# Altium PCB Sub1G_V2.2_ZM_revA_20160823.PcbDoc
Units mm, origin at the board's own origin, x right, y up, seen from the top; angles counter-clockwise.
Board outline 48 x 21 mm, 4 copper layers (Top Layer, Internal Plane 1, Mid-Layer 1, Bottom Layer); 64 components, 50 nets, 228 pads, 155 vias.
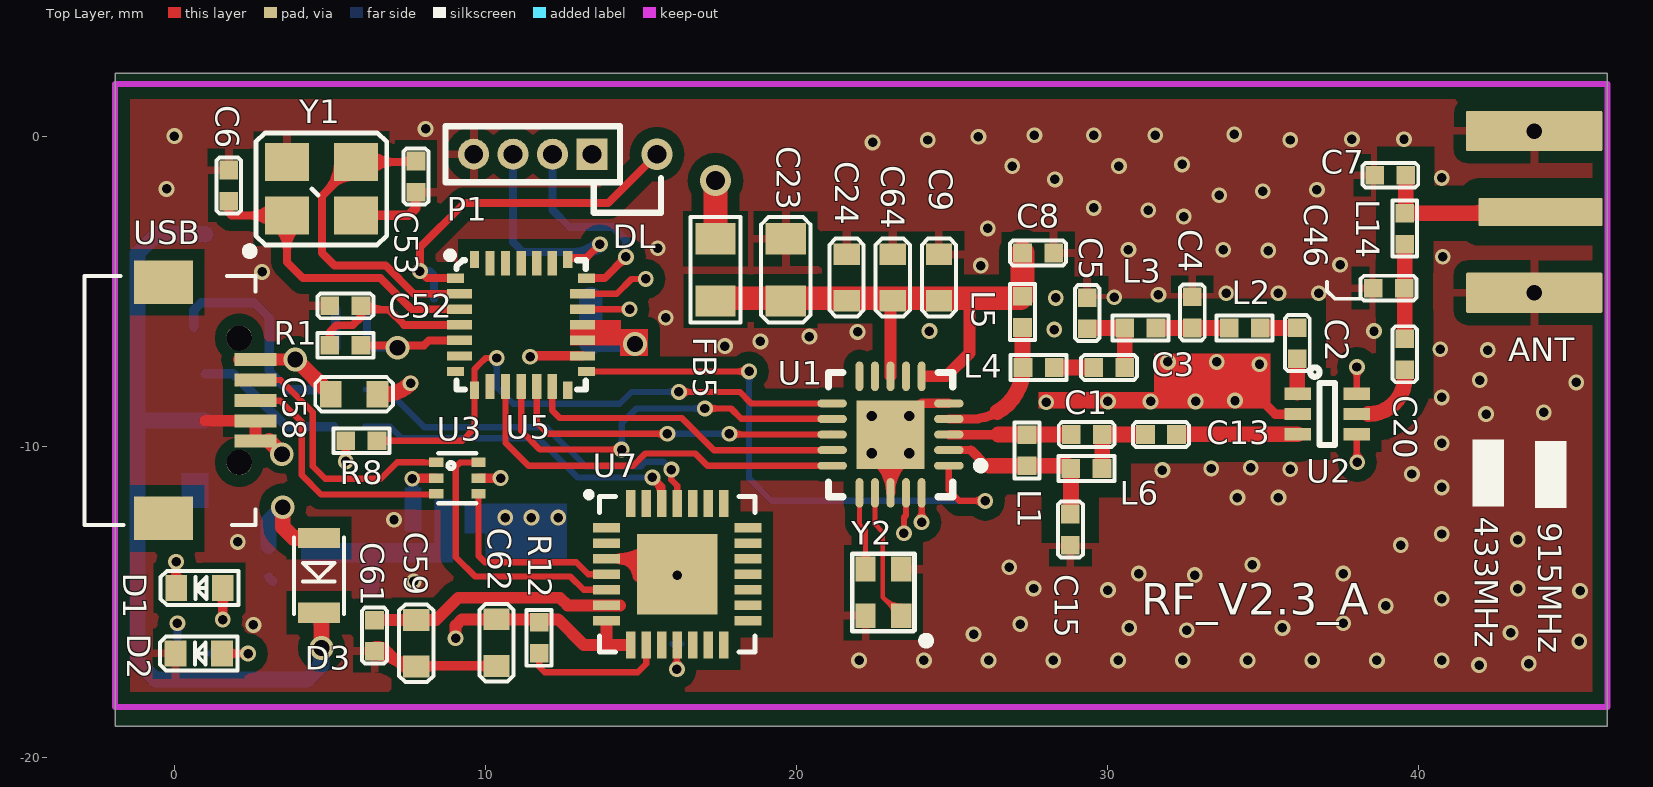
[diagram p0: Top Layer view]
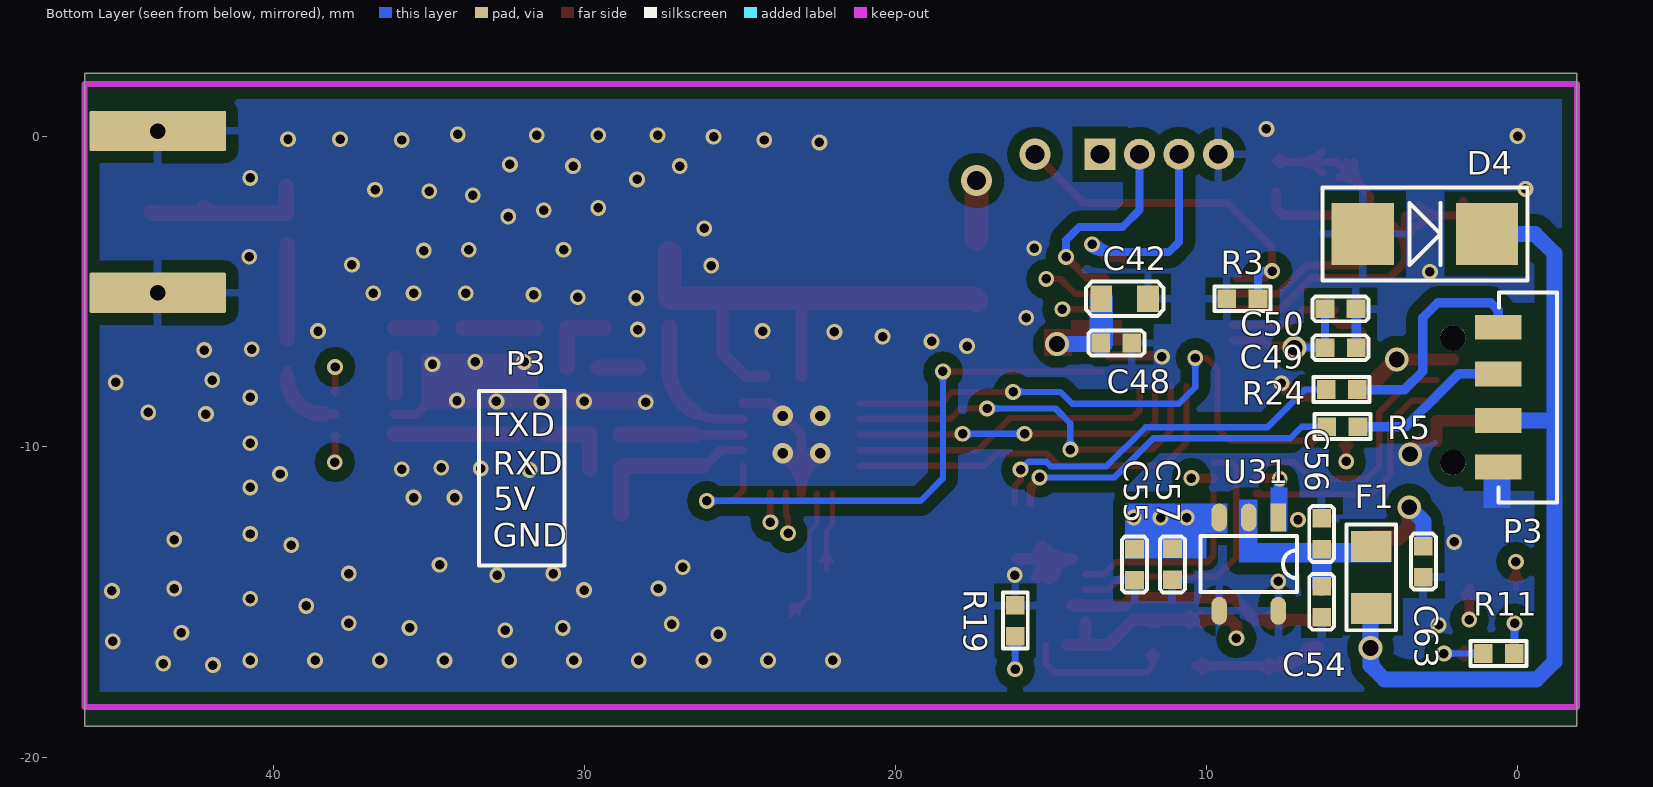
[diagram p1: Bottom Layer view, seen from below]
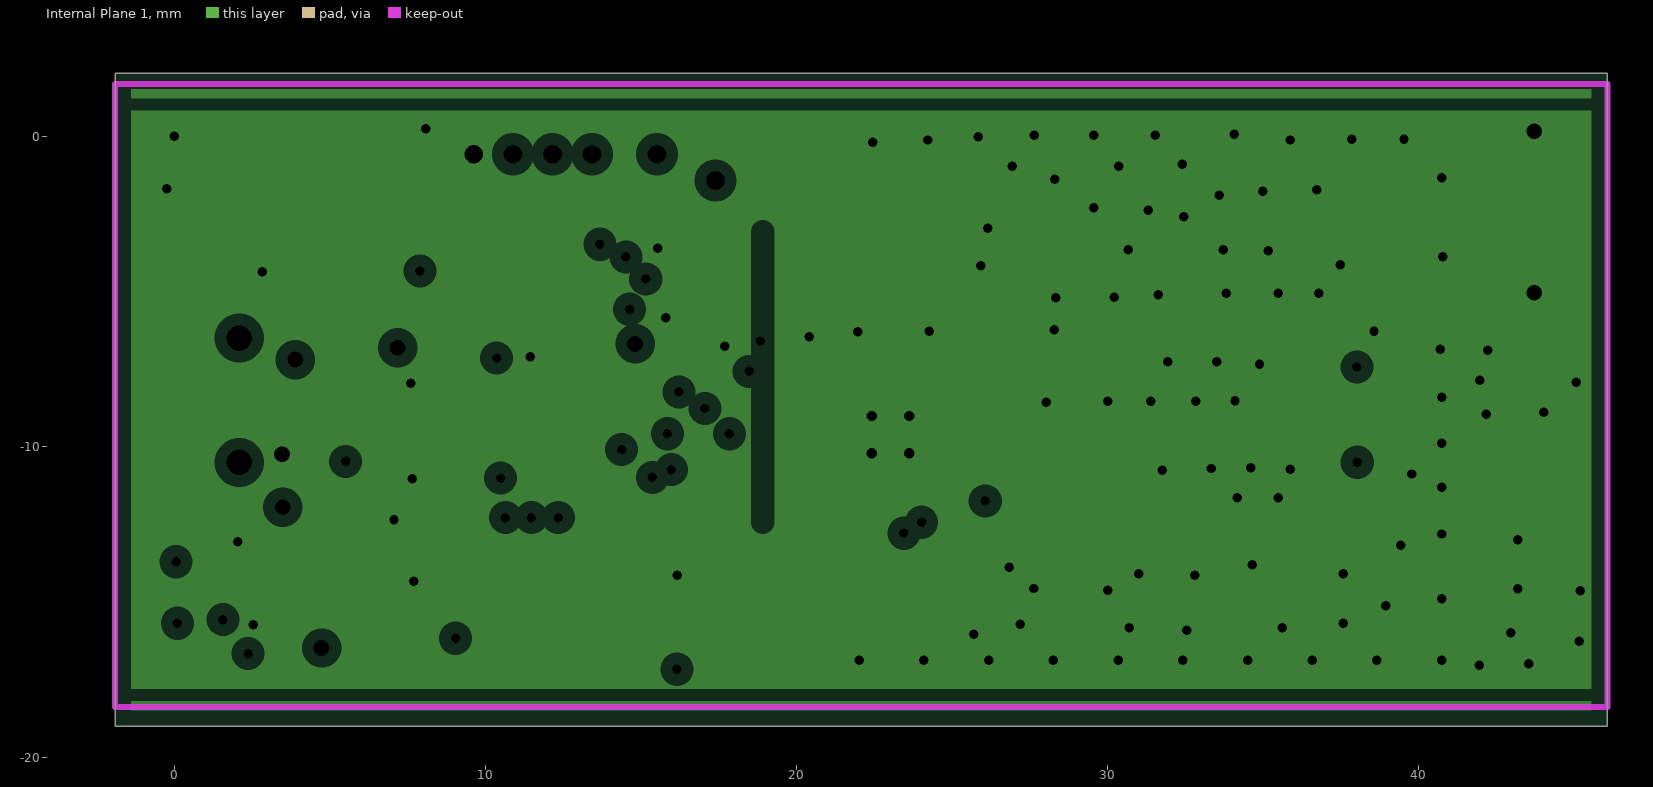
[diagram p2: Internal Plane 1, clearances drawn from the general rule]
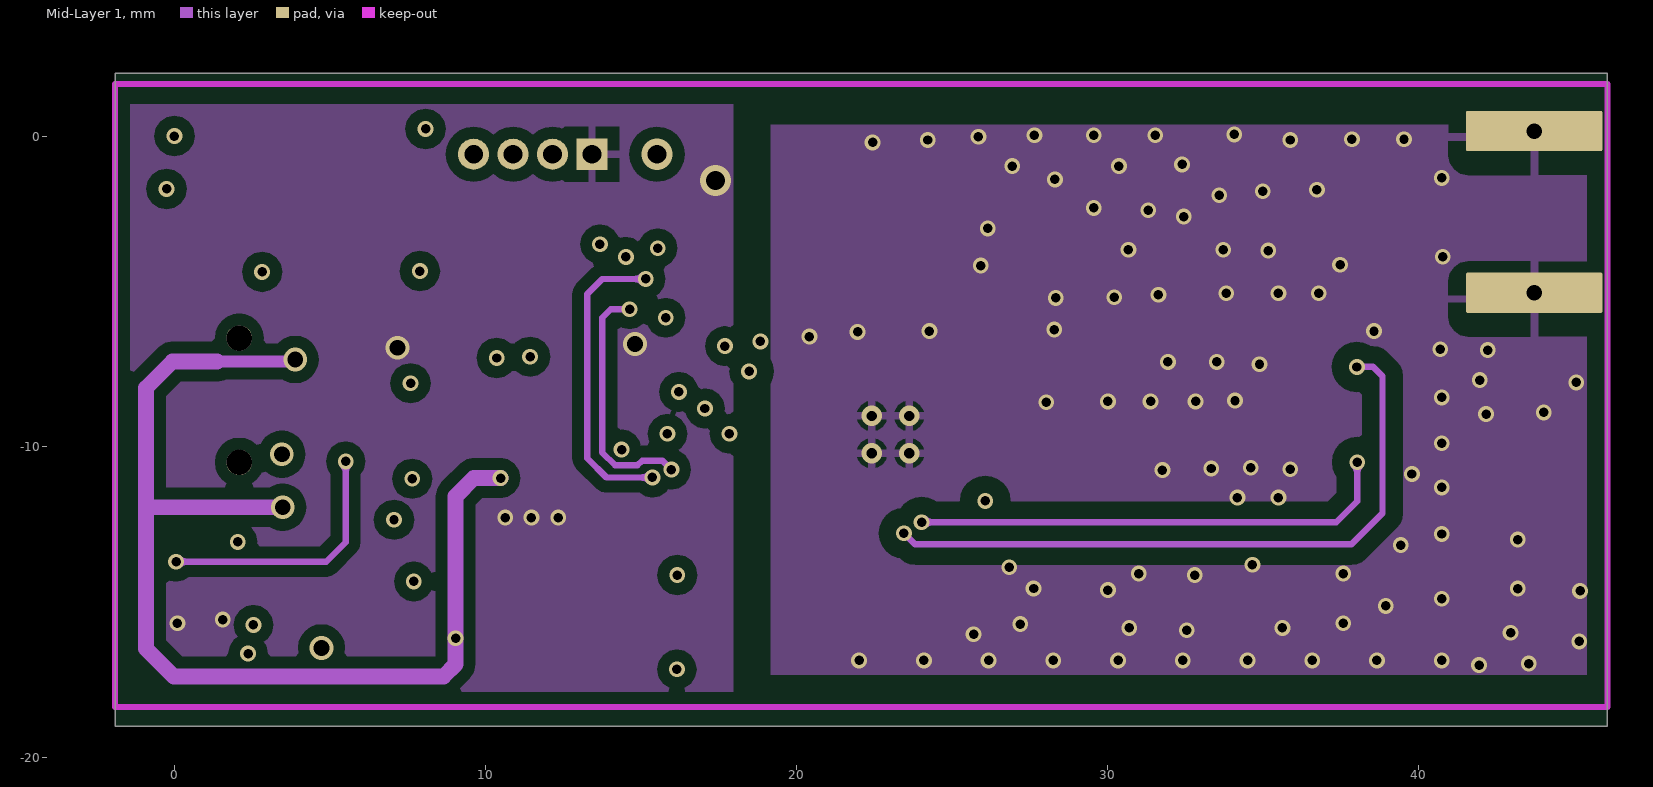
[diagram p3: Mid-Layer 1]

## Layer stack, top to bottom
Top Layer: signal copper 0.0356
Dielectric: core 0.32, FR-4, Dk 4.8
Internal Plane 1: plane copper 0.0356, net GND
Dielectric: prepreg 0.32, FR-4, Dk 4.8
Mid-Layer 1: signal copper 0.0356
Dielectric: core 0.32, FR-4, Dk 4.8
Bottom Layer: signal copper 0.0356

## Board outline
-1.911,-18.984 46.089,-18.984 46.089,2.016 -1.911,2.016

## Design rules (kind name [scope] priority, off if disabled: settings)
Clearance Polygon_RF [InNetClass('RF')] p1: gap=0.635
Clearance GND [InPoly And InNet(GND)] p2: gap=0.381
Clearance POWER [InNet('3V3')] p3: gap=0.381
Clearance [All] p4: gap=0.152
DiffPairsRouting [All] p1: maxlimit=0.254 minlimit=0.254 mostfreqgap=0.254 maxuncoupledlength=12.7
MinimumSolderMaskSliver [All] p1: minsoldermaskwidth=0.051
PlaneClearance [All] p1: clearance=0.381
PlaneConnect [All] p1: planeconnectstyle=Relief reliefexpansion=0.508 reliefentries=4 reliefconductorwidth=0.254 reliefairgap=0.254
PolygonConnect [IsVia] p1: connectstyle=Direct reliefconductorwidth=0.254 reliefentries=4 polygonreliefangle="90 Angle"
RoutingVias [All] p1: holewidth=0.711 width=1.27 viastyle="Through Hole" minholewidth=0.711 minwidth=1.27 maxholewidth=0.711 maxwidth=1.27
SilkToSilkClearance [All] p1: silktosilkclearance=0.076
SilkscreenOverComponentPads [All] p1: minsilkscreentomaskgap=0
SolderMaskExpansion [All] p1: expansion=0.102
Width [All] p1: maxlimit=5.08 minlimit=0.152 preferedwidth=0.254
22 further rules are at their usual default settings.

## Classes and differential pairs
component class USB: C59 C61 C62 C63 R12 R19 U7
component class RF: ANT C1 C2 C3 C4 C5 C7 C8 C9 C13 C15 C20 C23 C24 C46 C64 FB5 L1 L2 L3 L4 L5 L6 L14 TXRA U1 U2 Y2
component class POWER: C54 C55 C56 C57 D2 D3 D4 F1 R11 U31
component class MCU: C6 C42 C48 C49 C50 C52 C53 D1 P1 R1 R3 R8 U5 Y1
component class Interface: C58 P3 R5 R24 U3 USB
net class RF: NetANT_1 NetC1_1 NetC1_2 NetC2_1 NetC2_2 NetC3_1 NetC3_2 NetC4_1 NetC13_2 NetC15_2 NetC20_1 NetC20_2 NetL4_2
differential pair D: +D_P -D_N

## Components (designator, comment, footprint, x,y, rotation, side; value= is the part's Value field where it differs from the comment)
ANT "SMA/142-0711-821" "SMA END LAUNCH JACK RECEPTACLE SHORT" 43.936,-2.438 r90 top
C1 "1pF/50V" 0402C 28.843,-9.601 r0 top
C2 "56pF/50V" 0402C 36.117,-7.163 r90 top
C3 "3.3pF/50V" 0402C 29.564,-7.442 r0 top
C4 "2.7pF/50V" 0402C 32.739,-6.172 r90 top
C5 "4.7pF/50V" 0402C 29.36,-6.198 r90 top
C6 "8pF/50V" 0402C 1.747,-1.092 r270 top
C7 "4.3pF/50V" 0402C 38.606,-1.261 r0 top
C8 "56pF/50V" 0402C 27.278,-3.759 r0 top
C9 "33pF/50V" 0603C 24.59,-3.799 r270 top
C13 "56pF/50V" 0402C 31.231,-9.601 r0 top
C15 "3pF/50V" 0402C 28.818,-13.157 r90 top
C20 "56pF/50V" 0402C 39.571,-6.518 r270 top
C23 "22uF/10V" 0805C 19.662,-3.302 r270 top
C24 "100nF/10V" 0603C 21.618,-3.799 r270 top
C42 "10uF/25V" 0603C 13.386,-5.234 r180 bottom
C46 "4.3pF/50V" 0402C 38.555,-4.893 r0 top
C48 "0.01uF/50V" 0402C 13.405,-6.656 r180 bottom
C49 "0.01uF/50V" 0402C 6.192,-6.807 r180 bottom
C50 "0.01uF/50V" 0402C 6.194,-5.556 r180 bottom
C52 "0.01uF/50V" 0402C 5.998,-5.461 r180 top
C53 "8pF/50V" 0402C 7.766,-1.803 r90 top
C54 "0.1uF/50V" 0402C 6.299,-14.479 r270 bottom
C55 "0.1uF/50V" 0402C 12.319,-13.286 r270 bottom
C56 "10uF/25V" 0402C 6.299,-12.295 r270 bottom
C57 "10uF/25V" 0402C 11.1,-14.276 r90 bottom
C58 "10uF/25V" 0603C 6.528,-8.307 r180 top
C59 "4.7uF/25V" 0603C 7.778,-17.064 r90 top
C61 "0.1uF/50V" 0402C 6.433,-15.57 r270 top
C62 "10uF/25V" 0603C 10.357,-15.545 r270 top
C63 "0.1uF/50V" 0402C 3.029,-13.19 r270 bottom
C64 "100pF/50V" 0603C 23.104,-3.799 r270 top
D1 "LED0" 0603LED 1.555,-14.536 r180 top
D2 "LED0" 0603LED 1.53,-16.644 r180 top
D3 "NSR0320MW2T1G" SOD323 4.648,-12.93 r270 top
D4 "SMAJ18A" SMA 4.978,-3.15 r180 bottom
F1 "SMD0805-020" 0805R 4.705,-15.197 r90 bottom
FB5 "GZ2012D800TF" 0805CZ 17.402,-5.302 r90 top
L1 "18nH/0402HP-18NXJL" 0402R 27.421,-9.608 r270 top
L2 "10nH/0402HP-10NXJL" 0402R 34.923,-6.172 r180 top
L3 "10nH/0402HP-10NXJL" 0402R 31.57,-6.172 r180 top
L4 "13nH/0402HP-13NXJL" 0402R 28.294,-7.442 r180 top
L5 "120nH/0402HPH-R12XJL" 0402R 27.278,-5.156 r270 top
L6 "22nH/0402HP-22NXJL" 0402R 29.834,-10.693 r180 top
L14 "8.2nH/0402HP-8N2XJL" 0402R 39.571,-2.48 r270 top
P1 "MHDR1X4" MHDR1X4 13.431,-0.584 r180 top
P3 "Header 4" 4×1.5MMSMT_NOPAD 0.616,-10.65 r90 bottom
R1 "10K/5%/1/8W" 0402R 4.998,-6.731 r0 top
R3 "10K/5%/1/8W" 0402R 9.347,-5.232 r180 bottom
R5 "22/5%/1/8W" 0402R 5.131,-9.347 r0 bottom
R8 "1K/5%/1/8W" 0402R 5.512,-9.8 r0 top
R11 "1K/5%/1/8W" 0402R 0.108,-16.644 r0 bottom
R12 "1K/5%/1/8W" 0402R 11.728,-15.638 r270 top
R19 "10K/5%/1/8W" 0402R 16.154,-15.088 r270 bottom
R24 "22/5%/1/8W" 0402R 5.156,-8.153 r0 bottom
U1 "Si4463-C2A-GM" QFN50P400X400X80-20N 23.032,-9.601 r180 top
U2 "UPG2214TB" SC70-6 37.082,-8.941 r0 top
U3 "NUF2042XV6T1" SOT563-6 9.093,-11 r270 top
U5 "STM32F042G6U6" UFQFPN28 9.144,-4.572 r0 top
U7 "CP2102" QFN28N5X5-0P5P-L 16.174,-14.097 r0 top
U31 "TLV70433DBVT" SOT23-5(DBV) 7.696,-12.27 r270 bottom
USB "Header 5" MICRO_USB_PH -0.209,-8.509 r0 top locked
Y1 "16MHz" OSCILLATOR-3.2X2.5 4.718,-1.702 r0 top
Y2 "TZ1430A" OSCILLATOR-2.5X2.0 22.803,-14.681 r90 top

## Footprints (in the part's own frame and the unit in brackets; to place one, negate y for a bottom-side part, rotate by r counter-clockwise, add the part's x,y. Pads: shape width x height; smd on the part's side, far side on the other; paste and mask are expansions set on the pad)
4×1.5MMSMT_NOPAD [mm]
  rect 0.8x1.5 smd: 1(0,0) 2(1.5,0) 3(3,0) 4(4.5,0)
  round 0.5 on Bottom Overlay: ""(-0.875,0.432)
  silkscreen extent -1.14,-1.88 5.61,0
0402C [mm]
  rect 0.6x0.6 smd: 1(0,0) 2(1,0)
  silkscreen extent -0.4,-0.4 1.4,0.4
0402R [mm]
  rect 0.6x0.6 smd: 1(0,0) 2(1,0)
  silkscreen extent -0.4,-0.4 1.4,0.4
0603C [mm]
  rect 0.7x0.85 smd: 1(0,0) 2(1.5,0)
  silkscreen extent -0.5,-0.55 2,0.55
0603LED [mm]
  rect 0.7x0.85 smd: 1(0,0) 2(1.5,0)
  silkscreen extent -0.5,-0.55 2,0.55
0805C [mm]
  rect 1x1.3 smd: 1(0,0) 2(2,0)
  silkscreen extent -0.7,-0.8 2.7,0.8
0805CZ [mm]
  rect 1x1.3 smd: 1(0,0) 2(2,0)
  silkscreen extent -0.7,-0.8 2.7,0.8
0805R [mm]
  rect 1x1.3 smd: 1(0,0) 2(2,0)
  silkscreen extent -0.7,-0.8 2.7,0.8
MHDR1X4 [mm] "Connector; Header; 4 Position"
  rect 1x1 hole 0.6: 1(0,0)
  round 1 hole 0.6: 2(1.27,0) 3(2.54,0) 4(3.81,0)
  silkscreen extent -0.9,-0.9 4.71,0.9
MICRO_USB_PH [mm]
  rect 1.35x0.42 smd: 1(2.819,1.321) 2(2.819,0.66) 3(2.819,0) 4(2.819,-0.65) 5(2.819,-1.3)
  round 0.82 hole 0.82 unplated: 3(2.294,2.01) 4(2.294,-1.99)
  rect 1.9x1.4 smd: 6(-0.144,3.811) 9(-0.144,-3.789)
  silkscreen extent -2.68,-4 2.82,4.01
OSCILLATOR-2.5X2.0 [mm] "OSCILLATOR-3.2X2.5"
  rect 0.8x0.65 smd: 1(-0.75,-0.575) 2(0.75,-0.575) 3(0.75,0.575) 4(-0.75,0.575)
  silkscreen extent -1.65,-1.47 1.25,1
OSCILLATOR-3.2X2.5 [mil] "OSCILLATOR-3.2X2.5"
  rect 56x48 smd: 1(-43.31,-33.46) 2(44,-33.46) 3(44,34) 4(-43.31,34)
  silkscreen extent -95,-83 83,71
QFN28N5X5-0P5P-L [mil]
  rect 34x12 smd mask+5: 1(-89.5,59.06) 2(-89.5,39.37) 3(-89.5,19.68) 4(-89.5,0) 5(-89.5,-19.68) 6(-89.5,-39.37) 7(-89.5,-59.06) 15(89.5,-59.06) 16(89.5,-39.37) 17(89.5,-19.68) 18(89.5,0) 19(89.5,19.68) 20(89.5,39.37) 21(89.5,59.06)
  rect 12x34 smd mask+5: 8(-59.06,-89.5) 9(-39.37,-89.5) 10(-19.68,-89.5) 11(0,-89.5) 12(19.68,-89.5) 13(39.37,-89.5) 14(59.06,-89.5) 22(59.06,89.5) 23(39.37,89.5) 24(19.68,89.5) 25(0,89.5) 26(-19.68,89.5) 27(-39.37,89.5) 28(-59.06,89.5)
  rect 102.36x102.36 smd mask+5: 29(0,0)
  silkscreen extent -114,-98 98,103
QFN50P400X400X80-20N [mm] "QFN, 20-Leads, Body 4.0x4.0mm (max), Pitch 0.50mm, IPC Medium Density"
  oval 0.95x0.25 smd: 1(-1.875,1) 2(-1.875,0.5) 3(-1.875,0) 4(-1.875,-0.5) 5(-1.875,-1) 11(1.875,-1) 12(1.875,-0.5) 13(1.875,0) 14(1.875,0.5) 15(1.875,1)
  oval 0.25x0.95 smd: 6(-1,-1.875) 7(-0.5,-1.875) 8(0,-1.875) 9(0.5,-1.875) 10(1,-1.875) 16(1,1.875) 17(0.5,1.875) 18(0,1.875) 19(-0.5,1.875) 20(-1,1.875)
  rect 2.2x2.2 smd: 21(0,0)
  silkscreen extent -3.03,-2 2,2
SC70-6 [mm] "SC70 6-Leads, Body 2.0x1.25mm, Pitch 0.65mm"
  rect 0.85x0.4 smd mask+0.05: 1(-0.95,0.65) 2(-0.95,0) 3(-0.95,-0.65) 4(0.95,-0.65) 5(0.95,0) 6(0.95,0.65)
  silkscreen extent -0.55,-1 0.25,1.5, body extent -0.63,-1 0.63,1, height 1.45
SMA [mm]
  rect 2x2 smd: 1(0,0) 2(4,0)
  silkscreen extent -1.3,-1.5 5.3,1.5
"SMA END LAUNCH JACK RECEPTACLE SHORT" [mm] "SMA Connector - End Launch Jack Receptacle - Short"
  rrect10% 0.9x4 smd paste+0 mask+0.05: 1(0,0)
  rrect10% 1.3x4.4 hole 0.5 mask+0.05: 2(-2.6,0.2) 2(2.6,0.2)
  body extent -0.5,-2.05 0.5,2.05, height 8
SOD323 [mm]
  rect 0.65x1.35 smd: A(0,0) K(2.4,0)
  silkscreen extent -0.03,-0.8 2.44,0.8
SOT23-5(DBV) [mm]
  rect 0.9x0.5 smd: 1(0,0)
  oval 0.9x0.5 smd: 2(0,-0.95) 3(0,-1.9) 4(3,-1.9) 5(3,0)
  silkscreen extent 0.6,-2.5 2.4,0.6
SOT563-6 [mil] "SOT563-6"
  rect 12x18 smd: 1(-19.68,-26.57) 2(0,-26.57) 3(20,-26.57) 4(20,27) 5(0,27) 6(-19.68,27)
  silkscreen extent -31,-24 32,24
UFQFPN28 [mm]
  rect 0.55x0.3 smd: 1(-0.1,0) 7(-0.1,-3) 15(4.11,-3) 21(4.11,0)
  rect 0.8x0.3 smd: 2(0.025,-0.5) 3(0.025,-1) 4(0.025,-1.5) 5(0.025,-2) 6(0.025,-2.5) 16(3.985,-2.5) 17(3.985,-2) 18(3.985,-1.5) 19(3.985,-1) 20(3.985,-0.5)
  rect 0.3x0.55 smd: 8(0.505,-3.605) 14(3.505,-3.605) 22(3.505,0.605) 28(0.505,0.605)
  rect 0.3x0.8 smd: 9(1.005,-3.48) 10(1.505,-3.48) 11(2.005,-3.48) 12(2.505,-3.48) 13(3.005,-3.48) 23(3.005,0.48) 24(2.505,0.48) 25(2.005,0.48) 26(1.505,0.48) 27(1.005,0.48)
  silkscreen extent -0.37,-3.58 4.08,0.83

## Part data
ANT: library part SMA, "SMA Straight Connector"
C1 C2 C3 C4 C5 C7 C8 C13 C15 C20 C46: library part Cap, "Capacitor SMD"
C6 C42 C48 C49 C50 C52 C53 C54 C55 C56 C57 C58 C59 C61 C62 C63: library part Cap, "Capacitor"
C9 C23 C24 C64: library part "Cap Semi", "Capacitor (Semiconductor SIM Model)"
D1 D2: "Typical INFRARED GaAs LED"
D3: library part Diode, "Default Diode"
D4: library part "DIODE S", "Schottky Diode"
F1: library part "Fuse 1", "Fuse"
FB5: library part FB
L1 L2 L3 L4 L5 L6 L14: library part Inductor, "Inductor SMD"
P1 P3: "Header, 4-Pin"
R1 R3 R8 R11 R12 R19: library part Res2, "Resistor"
R5 R24: library part Resistor, "Resistor SMD - IEC symbol version"
U1: library part Si4463
U2: library part "PE4259 RF Switch", "PE4259 Peregrine RF Switch"
U7: "Imported"
U31: library part TPS76318
USB: "Header, 5-Pin"
Y1 Y2: library part XTAL3

## Via types
v1: diameter 0.508, hole 0.305, Top Layer to Bottom Layer, tented both sides, 143 vias
v2: diameter 0.762, hole 0.508, Top Layer to Bottom Layer, tented both sides, 6 vias
v3: diameter 0.66, hole 0.33, Top Layer to Bottom Layer, tented top, 4 vias
v4: diameter 1, hole 0.6, Top Layer to Bottom Layer, tented both sides, 1 vias
v5: diameter 1, hole 0.6, Top Layer to Bottom Layer, 1 vias

## Nets (pads, with @x,y where several pads share a name; then routed paths per layer and width w, separated by ;. In a path a pad name is that pad's centre, name@x,y a point inside that pad or via, vN(x,y) a via of type N, cw(c..) or ccw(c..) an arc to the next point about the centre after c; other vN are vias at no path point)
3V3: C42.1 C48.1 C49.1 C50.1 C55.1 C57.2 D1.1 FB5.2 P1.1 R1.2 R11.1 U5.5 U5.17 U5.18 U31.3 | length 15.7
  Top Layer w0.254: R1.2 8.026,-6.731 8.185,-6.572 U5.5
  Top Layer w0.305: v1(1.555,-15.552) D1.1 ; 1.555,-15.088 cw(c2.032,-15.088) 1.695,-14.751 ccw(c2.032,-15.088) 1.555,-15.088 ; 1.555,-15.088 ccw(c1.078,-15.088) 1.416,-14.751 cw(c1.078,-15.088) 1.555,-15.088
  Top Layer w0.762: FB5.2 v4(17.402,-1.431)
  Bottom Layer w0.254: v1(0.096,-15.672) 0.096,-16.683 R11.1@0.108,-16.695 ; C50.1 6.194,-6.804 C49.1 v2@7.049,-6.807 ; 0.096,-15.978 cw(c0.402,-15.978) 0.185,-15.762 ccw(c0.402,-15.978) 0.096,-15.978 ; 0.096,-15.978 ccw(c-0.211,-15.978) 0.006,-15.762 cw(c-0.211,-15.978) 0.096,-15.978 ; R11.1@-0.015,-16.522 ccw(c-0.281,-16.256) 0.096,-16.256 cw(c-0.281,-16.256) R11.1@-0.015,-16.522 ; 0.096,-16.198 ccw(c0.554,-16.198) 0.23,-16.522 cw(c0.554,-16.198) 0.096,-16.198
  Bottom Layer w0.508: C48.1@13.595,-6.688 v2(14.814,-6.688)
  Bottom Layer w0.762: C48.1@13.386,-6.656 C42.1
  other v1: 10.643,-12.27 11.481,-12.27 12.344,-12.27
  other v2: 7.176,-6.807
D_N: U3.6 U7.5 | length 9.6
  Top Layer w0.203: 9.048,-11.73 9.048,-12.32 ; U3.6 9.187,-10.5 9.048,-10.638 9.048,-12.32 ; U7.5 13.165,-14.597 12.736,-14.169 9.671,-14.169 9.048,-13.546 9.048,-12.32
D_P: U3.4 U7.4 | length 6.4
  Top Layer w0.203: U3.4 9.779,-13.502 9.988,-13.711 12.926,-13.711 13.311,-14.097 U7.4
GND: ANT.2 C4.2 C5.2 C6.1 C7.1 C8.2 C9.1 C15.1 C23.1 C24.1 C42.2 C46.1 C48.2 C49.2 C50.2 C52.2 C53.1 C54.2 C55.2 C56.1 C57.1 C58.1 C59.1 C61.2 C62.2 C63.2 C64.1 D2.2 D4.1 P1.4 P3.1 R3.1 R19.1 U1.5 U1.18 U1.21 U2.2 U3.2 U5.16 U7.3 U7.29 U31.1 U31.4 U31.5 USB.4@2.61,-9.159 USB.5 Y1.2 Y1.4 Y2.2 Y2.4 | length 43.5
  Top Layer w0.305: Y1.2 7.532,-2.552 7.766,-2.317 C53.1 ; C61.2@6.359,-16.431 cw(c6.532,-16.754) 6.791,-16.495 ; C61.2@6.433,-16.717 cw(c6.433,-18.118) C59.1@7.423,-17.127 ; C61.2 6.865,-16.57 7.36,-17.064 C59.1 7.798,-17.045 C62.2 ; C61.2@6.433,-16.412 cw(c6.433,-17.077) 6.903,-16.607 ; C61.2@6.502,-16.7 cw(c6.734,-17.133) 7.082,-16.786 ; C61.2@6.537,-16.674 cw(c6.789,-16.926) 6.789,-16.57 cw(c6.789,-16.213) C61.2@6.537,-16.465 ; 7.037,-16.741 ccw(c7.446,-16.332) C59.1@7.638,-16.878 ; v1@7.645,-11 U3.2 ; C59.1@7.993,-17.204 cw(c8.377,-17.588) 8.377,-17.045 ; C59.1@7.993,-16.924 ccw(c8.284,-16.634) 8.284,-17.045 ; C62.2@10.142,-17.185 ccw(c9.805,-17.522) 9.805,-17.045 ccw(c9.805,-16.568) C62.2@10.142,-16.905 ; v1@11.439,-7.072 11.445,-7.067 U5.16@13.129,-7.067 ; v1@11.511,-7.168 cw(c11.756,-7.412) 11.756,-7.067 ; U1.5 24.032,-8.601 U1.21 U1.18 ; 35.052,-8.587 35.406,-8.941 U2.2 ; U1.18 cw(c24.413,-11.476) 23.594,-10.364 ccw(c24.413,-11.476) U1.18 ; U1.18 ccw(c21.651,-11.476) 22.47,-10.364 cw(c21.651,-11.476) U1.18 ; 23.032,-10.873 cw(c23.969,-10.873) 23.413,-10.119 ccw(c23.969,-10.873) 23.032,-10.873 ; 23.032,-10.873 ccw(c22.095,-10.873) 22.651,-10.119 cw(c22.095,-10.873) 23.032,-10.873
  Top Layer w0.381: 1.001,-9.159 2.61,-9.159 USB.5 USB.5@3.051,-9.809 ; 14.34,-13.597 ccw(c14.34,-12.263) U7.29@15.283,-13.206 ; 14.702,-13.597 ccw(c14.702,-12.626) U7.29@15.389,-13.312 ; 14.731,-13.597 cw(c14.731,-14.163) U7.29@15.296,-14.137 ; 14.768,-13.597 cw(c14.768,-14.287) U7.29@15.452,-14.194 ; U7.29@14.916,-14.154 ccw(c14.332,-14.181) 14.332,-13.597 ; U7.29@15.074,-14.245 ccw(c14.332,-14.346) 14.332,-13.597 ; U7.29@16.106,-13.597 14.332,-13.597
  Top Layer w0.508: USB.5@3.051,-9.809 v2@3.454,-10.212 ; C58.1@6.733,-8.307 ccw(c6.733,-7.088) v1(7.595,-7.95)
  Bottom Layer w0.305: C63.2 C63.2@3.156,-14.317 ; C49.2 5.192,-5.559 C50.2 ; v1@7.574,-11.095 cw(c7.277,-11.392) 7.696,-11.392 ; U31.1 v1@7.696,-11.074
  other v1: 41.961,-17.018 43.561,-16.967 22.022,-16.866 24.104,-16.866 26.186,-16.866 28.268,-16.866 30.35,-16.866 32.432,-16.866 34.515,-16.866 36.597,-16.866 38.679,-16.866 40.761,-16.866 45.187,-16.256 25.705,-16.027 42.977,-15.975 32.563,-15.899 30.709,-15.823 35.636,-15.823 2.54,-15.723 27.203,-15.697 37.592,-15.67 38.964,-15.112 40.761,-14.883 45.212,-14.63 30.023,-14.605 27.635,-14.553 43.205,-14.554 7.696,-14.326 16.174,-14.121 32.817,-14.122 31.013,-14.072 37.592,-14.072 26.848,-13.868 34.671,-13.791 39.446,-13.157 2.032,-13.056 43.205,-12.978 40.761,-12.8 7.061,-12.344 34.188,-11.63 35.509,-11.63 40.761,-11.302 7.645,-11.024 39.802,-10.87 31.775,-10.744 35.89,-10.719 33.35,-10.693 34.62,-10.668 40.761,-9.879 42.189,-8.941 44.044,-8.89 28.042,-8.56 30.023,-8.534 31.394,-8.534 32.842,-8.534 34.112,-8.509 40.761,-8.406 45.085,-7.925 41.986,-7.847 34.9,-7.341 31.953,-7.264 33.528,-7.264 11.439,-7.096 42.24,-6.883 40.716,-6.858 17.704,-6.756 18.847,-6.604 20.422,-6.452 21.971,-6.299 24.282,-6.274 38.583,-6.274 28.296,-6.223 15.799,-5.842 28.346,-5.207 30.226,-5.182 31.648,-5.105 33.833,-5.055 35.509,-5.055 36.805,-5.055 2.819,-4.369 25.933,-4.166 37.49,-4.14 40.792,-3.885 35.179,-3.683 30.683,-3.658 33.731,-3.658 15.545,-3.607 26.162,-2.972 32.461,-2.591 31.318,-2.388 29.566,-2.311 33.604,-1.905 35.001,-1.778 36.748,-1.726 -0.254,-1.7 28.321,-1.396 40.761,-1.345 26.949,-0.965 30.378,-0.965 32.41,-0.914 22.454,-0.203 24.232,-0.127 35.89,-0.127 37.871,-0.102 39.548,-0.102 25.857,-0.025 0,0 27.661,0.027 29.566,0.027 31.547,0.025 34.087,0.051 8.077,0.229
  other v2: 3.454,-10.236
  other v3: 22.432,-10.201 23.632,-10.201 22.432,-9.001 23.632,-9.001
NetANT_1: ANT.1 C7.2 L14.1 | length 5.6
  Top Layer w0.508: L14.1 43.895,-2.48 ANT.1 ; L14.1@39.606,-2.311 39.606,-1.616 ; 41.813,-2.48 ccw(c41.813,-1.865) ANT.1@42.247,-2.3
NetC1_1: C1.1 L1.1 U1.3 | length 3.9
  Top Layer w0.305: U1.3 26.498,-9.601
  Top Layer w0.508: 26.498,-9.603 28.071,-9.603 28.073,-9.601 C1.1
NetC1_2: C1.2 C13.1 L6.1 | length 2.5
  Top Layer w0.508: L6.1 29.843,-10.684 C1.2 C13.1
NetC2_1: C2.1 U2.1 | length 1.2
  Top Layer w0.305: C2.1 C2.1@36.132,-7.178 ; U2.1@36.132,-8.254 U2.1 ; U2.1 cw(c36.169,-8.254) 36.117,-8.254 ccw(c36.169,-8.254) U2.1
  Top Layer w0.508: U2.1@36.117,-8.254 C2.1
NetC2_2: C2.2 L2.1 | length 1.2
  Top Layer w0.305: C2.2@36.107,-6.172 C2.2 ; L2.1 cw(c34.932,-6.172) 34.932,-6.163 ccw(c34.932,-6.172) L2.1
  Top Layer w0.508: L2.1 C2.2@36.107,-6.172
NetC3_1: C3.1 L4.1 | length 1.3
  Top Layer w0.508: L4.1 C3.1
NetC3_2: C3.2 C5.1 L3.2 | length 2.5
  Top Layer w0.305: C5.1 cw(c29.386,-6.198) C5.1@29.386,-6.172 ; C3.2 ccw(c30.564,-7.436) C3.2@30.57,-7.436 ; C3.2 ccw(c30.564,-7.436) C3.2@30.57,-7.436 ; C3.2 ccw(c30.564,-7.436) C3.2@30.57,-7.436
  Top Layer w0.508: C5.1@29.386,-6.172 L3.2 30.564,-6.179 C3.2
NetC4_1: C4.1 L2.2 L3.1 | length 2.4
  Top Layer w0.508: L3.1 C4.1 L2.2
NetC13_2: C13.2 U2.3 | length 3.9
  Top Layer w0.305: U2.3@36.081,-9.601 ccw(c36.081,-9.566) U2.3@36.107,-9.591
  Top Layer w0.508: C13.2 32.241,-9.591 36.107,-9.591 U2.3
NetC15_2: C15.2 L1.2 L6.2 U1.2 | length 6.8
  Top Layer w0.254: U1.2 25.619,-10.101 ; 26.126,-10.608 26.701,-10.608
  Top Layer w0.305: 25.619,-10.101 26.126,-10.608 ; L6.2@28.748,-10.608 L6.2
  Top Layer w0.508: 26.202,-10.608 26.701,-10.608 L1.2 L6.2@28.748,-10.608 ; C15.2 28.834,-12.141 L6.2 ; 28.515,-10.608 cw(c28.515,-11.012) 28.801,-10.726 ccw(c28.515,-11.012) 28.515,-10.608
NetC20_1: C20.1 C46.2 L14.2 | length 3
  Top Layer w0.508: C20.1 L14.2
NetC20_2: C20.2 U2.5 | length 2.5
  Top Layer w0.305: U2.5 U2.5@38.41,-8.941 ; C20.2@39.571,-7.78 C20.2
  Top Layer w0.508: U2.5@38.41,-8.941 ccw(c38.41,-7.78) C20.2@39.571,-7.78
NetC54_1: C54.1 C56.2 F1.2 U31.2 | length 0.9
  Bottom Layer w0.635: C54.1 C56.2@6.299,-13.564
NetC59_2: C59.2 C61.1 U7.6 | length 10.7
  Top Layer w0.381: C61.1 C59.2@7.773,-15.57 ; C59.2 C59.2@7.773,-15.57 ; 14.332,-15.097 U7.6 12.645,-15.097 12.4,-14.852 9.127,-14.852 8.409,-15.57 C59.2@7.773,-15.57 ; 7.305,-15.57 ccw(c7.305,-15.166) 7.591,-15.451 cw(c7.305,-15.166) 7.305,-15.57 ; 7.331,-15.57 cw(c7.331,-15.936) 7.591,-15.677 ccw(c7.331,-15.936) 7.331,-15.57 ; C59.2@7.966,-15.677 cw(c8.226,-15.936) 8.226,-15.57 ccw(c8.226,-15.936) C59.2@7.966,-15.677 ; C59.2@7.966,-15.451 ccw(c8.251,-15.166) 8.251,-15.57 cw(c8.251,-15.166) C59.2@7.966,-15.451
NetD1_2: D1.2 R8.1 | length 13.8
  Top Layer w0.203: D1.2@-0.12,-14.286 ccw(c-0.533,-13.873) v1@0.051,-13.873 ; v1@-0.057,-13.8 cw(c-0.317,-14.06) 0.051,-14.06 cw(c0.419,-14.06) v1@0.159,-13.8 ; v1@0.051,-13.851 ccw(c0.666,-13.851) D1.2@0.231,-14.286 ; v1(0.051,-13.692) 0.051,-14.532 D1.2 ; R8.1@5.372,-9.94 cw(c5.033,-10.279) 5.512,-10.279 cw(c5.991,-10.279) R8.1@5.652,-9.94 ; v1@5.398,-10.357 ccw(c5.123,-10.082) R8.1@5.512,-10.082 ; v1@5.512,-10.459 R8.1 ; 5.512,-10.111 ccw(c5.859,-10.111) v1@5.614,-10.357
  Mid-Layer 1 w0.203: v1(0.051,-13.692) 4.877,-13.692 5.506,-13.063 v1(5.506,-10.465) ; v1@0.159,-13.8 cw(c0.419,-14.06) 0.419,-13.692 cw(c0.419,-13.324) v1@0.159,-13.584 ; v1@5.398,-10.573 cw(c5.138,-10.833) 5.506,-10.833 cw(c5.874,-10.833) v1@5.614,-10.573
NetD2_1: D2.1 R11.2 | length 6.5
  Top Layer w0.203: D2.1 v1(2.368,-16.644) ; 2,-16.644 cw(c2,-17.012) 2.26,-16.752 ccw(c2,-17.012) 2,-16.644 ; 2,-16.644 ccw(c2,-16.276) 2.26,-16.537 cw(c2,-16.276) 2,-16.644 ; v1@2.13,-16.644 cw(c2.13,-16.045) 1.706,-16.469 ccw(c2.13,-16.045) v1@2.13,-16.644 ; v1@2.13,-16.644 ccw(c2.13,-17.244) 1.706,-16.82 cw(c2.13,-17.244) v1@2.13,-16.644
  Bottom Layer w0.203: R11.2 v1(2.368,-16.644) ; R11.2@1.248,-16.785 cw(c1.587,-17.123) 1.587,-16.644 cw(c1.587,-16.165) R11.2@1.248,-16.504 ; v1@2.26,-16.752 ccw(c2,-17.012) 2,-16.644 ccw(c2,-16.276) v1@2.26,-16.537
NetL4_2: L4.2 L5.2 U1.4 | length 6.4
  Top Layer w0.305: U1.4 25.635,-9.101 ccw(c25.635,-7.442) L4.2 L4.2@27.278,-7.426
  Top Layer w0.508: 26.464,-8.879 ccw(c25.635,-7.442) L4.2 ; L4.2@27.278,-7.426 L5.2
NetP3_3: P3.3 R5.1 | length 4.8
  Bottom Layer w0.305: P3.3@0.997,-7.65 1.898,-7.65 2.464,-8.216 3.595,-9.347 R5.1
NetP3_4: P3.4 R24.1 | length 7.3
  Bottom Layer w0.305: P3.4 0.616,-5.607 0.864,-5.359 2.565,-5.359 3.048,-5.842 3.048,-7.569 3.632,-8.153 R24.1@5.14,-8.153
NetR3_2: R3.2 U5.1 | length 12.1
  Top Layer w0.254: U5.1 8.122,-4.572 v1(7.893,-4.343) 7.893,-3.587 9.322,-2.159 13.945,-2.159 v5(15.519,-0.584)
  Bottom Layer w0.254: v1(7.893,-4.343) 8.204,-4.343 8.347,-4.486 R3.2
NetR12_2: R12.2 U7.9 | length 7
  Top Layer w0.203: R12.2@11.729,-16.561 11.729,-17.069 11.907,-17.247 14.902,-17.247 15.174,-16.975 U7.9 ; R12.2@11.589,-16.701 cw(c11.25,-17.04) 11.729,-17.04 ; R12.2@11.589,-16.701 cw(c11.25,-17.04) 11.729,-17.04 ; R12.2@11.589,-16.701 cw(c11.25,-17.04) 11.729,-17.04 ; 11.729,-17.04 cw(c12.208,-17.04) R12.2@11.869,-16.701 ; 11.729,-17.04 cw(c12.208,-17.04) R12.2@11.869,-16.701 ; 11.729,-17.04 cw(c12.208,-17.04) R12.2@11.869,-16.701
NetR19_2: R19.2 U7.11 | length 7
  Top Layer w0.203: v1(16.16,-17.152) U7.11@16.16,-16.479 ; U7.11@16.16,-16.784 cw(c15.792,-16.784) 16.053,-17.045 ccw(c15.792,-16.784) U7.11@16.16,-16.784 ; U7.11@16.16,-16.784 ccw(c16.528,-16.784) 16.268,-17.045 cw(c16.528,-16.784) U7.11@16.16,-16.784 ; 16.16,-16.805 cw(c16.329,-16.805) 16.21,-16.686 ccw(c16.329,-16.805) 16.16,-16.805
  Bottom Layer w0.203: v1(16.16,-17.152) R19.2@16.16,-16.187 ; R19.2@16.02,-16.327 cw(c15.681,-16.666) 16.16,-16.666 ; R19.2@16.02,-16.327 cw(c15.681,-16.666) 16.16,-16.666 ; R19.2@16.02,-16.327 cw(c15.681,-16.666) 16.16,-16.666 ; v1@16.053,-17.045 ccw(c15.792,-16.784) 16.16,-16.784 ; v1@16.053,-17.045 ccw(c15.792,-16.784) 16.16,-16.784 ; v1@16.053,-17.045 ccw(c15.792,-16.784) 16.16,-16.784 ; 16.16,-16.784 ccw(c16.528,-16.784) v1@16.268,-17.045 ; 16.16,-16.784 ccw(c16.528,-16.784) v1@16.268,-17.045 ; 16.16,-16.784 ccw(c16.528,-16.784) v1@16.268,-17.045 ; 16.16,-16.666 cw(c16.639,-16.666) R19.2@16.301,-16.327 ; 16.16,-16.666 cw(c16.639,-16.666) R19.2@16.301,-16.327 ; 16.16,-16.666 cw(c16.639,-16.666) R19.2@16.301,-16.327
NetU1_16: U1.16 Y2.3 | length 4.4
  Top Layer w0.152: U1.16 22.032,-12.491 22.228,-12.687 Y2.3 Y2.3@22.235,-13.924 ; 22.228,-13.256 cw(c21.628,-13.256) 22.052,-13.68 ccw(c21.628,-13.256) 22.228,-13.256 ; 22.228,-13.256 ccw(c22.829,-13.256) 22.404,-13.68 cw(c22.829,-13.256) 22.228,-13.256
  Top Layer w0.203: Y2.3@22.224,-13.935 Y2.3
NetU1_17: U1.17 Y2.1 | length 6.9
  Top Layer w0.152: U1.17 U1.17@22.533,-11.477 ; U1.17@22.579,-11.523 U1.17@22.533,-11.477 ; Y2.1 22.782,-14.835 22.782,-14.054 22.782,-12.742 22.533,-12.493 U1.17@22.533,-11.477 ; 22.825,-14.878 ccw(c23.378,-14.326) 23.378,-15.107 cw(c23.378,-14.326) 22.825,-14.878 ; 23.007,-15.06 cw(c22.71,-15.356) 23.129,-15.356 ccw(c22.71,-15.356) 23.007,-15.06 ; Y2.1@23.086,-15.139 ccw(c23.378,-14.846) 23.378,-15.26 cw(c23.378,-14.846) Y2.1@23.086,-15.139
NetU3_1: U3.1 USB.2 | length 8.4
  Top Layer w0.203: USB.2 3.414,-7.849 3.785,-8.219 4.445,-8.88 4.445,-10.625 4.845,-11.025 6.629,-11.025 7.163,-10.492 8.018,-10.492 8.026,-10.5 U3.1
NetU3_3: U3.3 USB.3@2.61,-8.509 | length 8.3
  Top Layer w0.203: USB.3@2.61,-8.509 3.4,-8.509 4.089,-9.198 4.089,-10.904 4.717,-11.532 8.394,-11.532 U3.3 U3.3@8.391,-11.481 ; 8.161,-11.532 ccw(c8.161,-11.327) U3.3@8.306,-11.472
NRST: C52.1 R1.1 U5.4 | length 10.9
  Top Layer w0.254: R1.1 4.998,-6.299 ; 5.033,-6.264 4.998,-6.299 ; C52.1 C52.1@5.998,-5.588 ; U5.4 7.387,-6.072 6.903,-5.588 C52.1@5.998,-5.588 ; R1.1@4.875,-6.609 ccw(c4.58,-6.313) 4.998,-6.313 ; R1.1@4.875,-6.609 ccw(c4.58,-6.313) 4.998,-6.313 ; R1.1@4.875,-6.609 ccw(c4.58,-6.313) 4.998,-6.313 ; 4.998,-6.313 ccw(c5.415,-6.313) R1.1@5.12,-6.609 ; 4.998,-6.313 ccw(c5.415,-6.313) R1.1@5.12,-6.609 ; 4.998,-6.313 ccw(c5.415,-6.313) R1.1@5.12,-6.609 ; 4.998,-6.299 5.21,-6.087 5.728,-6.087 5.998,-5.817 ; C52.1@5.891,-5.597 cw(c5.719,-5.817) 5.998,-5.817 ; C52.1@5.891,-5.597 cw(c5.719,-5.817) 5.998,-5.817 ; C52.1@5.891,-5.597 cw(c5.719,-5.817) 5.998,-5.817 ; 5.998,-5.817 cw(c6.277,-5.817) C52.1@6.105,-5.597 ; 5.998,-5.817 cw(c6.277,-5.817) C52.1@6.105,-5.597 ; 5.998,-5.817 cw(c6.277,-5.817) C52.1@6.105,-5.597 ; 5.998,-5.817 C52.1@5.998,-5.588 ; C52.1@6.12,-5.339 ccw(c6.722,-4.737) 6.722,-5.588 ; C52.1@6.12,-5.339 ccw(c6.722,-4.737) 6.722,-5.588 ; C52.1@6.12,-5.339 ccw(c6.722,-4.737) 6.722,-5.588
OSC_IN: C53.2 U5.2 Y1.3 | length 22.7
  Top Layer w0.254: C53.2 7.732,-0.838 Y1.3 5.834,-0.838 4.744,-1.928 4.744,-3.759 5.15,-4.166 6.792,-4.166 7.698,-5.072 U5.2@9.04,-5.072 ; U5.2@9.045,-5.067 U5.2@9.04,-5.072 ; U5.2@9.093,-5.072 U5.2@9.04,-5.072 ; U5.2 U5.2@9.04,-5.072 ; Y1.3@6.279,-1.179 cw(c7.103,-2.003) 7.103,-0.838 ; Y1.3@6.279,-1.179 cw(c7.103,-2.003) 7.103,-0.838 ; Y1.3@6.279,-1.179 cw(c7.103,-2.003) 7.103,-0.838 ; Y1.3@6.279,-0.497 ccw(c7.103,0.327) 7.103,-0.838 ; Y1.3@6.279,-0.497 ccw(c7.103,0.327) 7.103,-0.838 ; Y1.3@6.279,-0.497 ccw(c7.103,0.327) 7.103,-0.838 ; 7.265,-0.838 ccw(c7.265,-0.302) C53.2@7.644,-0.681 ; 7.265,-0.838 ccw(c7.265,-0.302) C53.2@7.644,-0.681 ; 7.265,-0.838 ccw(c7.265,-0.302) C53.2@7.644,-0.681 ; 7.433,-0.838 cw(c7.433,-1.137) C53.2@7.644,-0.926 ; 7.433,-0.838 cw(c7.433,-1.137) C53.2@7.644,-0.926 ; 7.433,-0.838 cw(c7.433,-1.137) C53.2@7.644,-0.926 ; 4.84,-1.832 ccw(c3.847,-0.838) 5.252,-0.838 cw(c3.847,-0.838) 4.84,-1.832 ; 5.08,-1.592 cw(c5.734,-2.246) 5.734,-1.321 ccw(c5.734,-2.246) 5.08,-1.592 ; Y1.3@5.274,-1.398 ccw(c4.714,-0.838) 5.506,-0.838 cw(c4.714,-0.838) Y1.3@5.274,-1.398
OSC_OUT: C6.2 U5.3 Y1.1 | length 24.2
  Top Layer w0.254: C6.2 1.747,-2.464 ; U5.3 7.623,-5.572 6.623,-4.572 4.134,-4.572 3.618,-4.056 Y1.1 1.835,-2.552 1.747,-2.464 ; C6.2@1.635,-2.225 cw(c1.434,-2.464) 1.747,-2.464 ; C6.2@1.635,-2.225 cw(c1.434,-2.464) 1.747,-2.464 ; C6.2@1.635,-2.225 cw(c1.434,-2.464) 1.747,-2.464 ; C6.2@1.635,-2.225 cw(c1.434,-2.464) 1.747,-2.464 ; C6.2@1.635,-2.225 cw(c1.434,-2.464) 1.747,-2.464 ; C6.2@1.635,-2.225 cw(c1.434,-2.464) 1.747,-2.464 ; 1.747,-2.464 cw(c2.059,-2.464) C6.2@1.858,-2.225 ; 1.747,-2.464 cw(c2.059,-2.464) C6.2@1.858,-2.225 ; 1.747,-2.464 cw(c2.059,-2.464) C6.2@1.858,-2.225 ; 1.747,-2.464 cw(c2.059,-2.464) C6.2@1.858,-2.225 ; 1.747,-2.464 cw(c2.059,-2.464) C6.2@1.858,-2.225 ; 1.747,-2.464 cw(c2.059,-2.464) C6.2@1.858,-2.225 ; 2.352,-2.552 cw(c2.352,-3.717) Y1.1@3.176,-2.893 ; 2.352,-2.552 ccw(c2.352,-1.387) Y1.1@3.176,-2.211 ; 2.352,-2.552 ccw(c2.352,-1.387) Y1.1@3.176,-2.211 ; 2.352,-2.552 cw(c2.352,-3.717) Y1.1@3.176,-2.893 ; 2.352,-2.552 ccw(c2.352,-1.387) Y1.1@3.176,-2.211 ; 2.352,-2.552 cw(c2.352,-3.717) Y1.1@3.176,-2.893 ; Y1.1@3.277,-2.893 cw(c2.453,-3.717) 3.618,-3.717 ; Y1.1@3.277,-2.893 cw(c2.453,-3.717) 3.618,-3.717 ; Y1.1@3.277,-2.893 cw(c2.453,-3.717) 3.618,-3.717 ; 3.618,-3.717 cw(c4.784,-3.717) Y1.1@3.96,-2.893 ; 3.618,-3.717 cw(c4.784,-3.717) Y1.1@3.96,-2.893 ; 3.618,-3.717 cw(c4.784,-3.717) Y1.1@3.96,-2.893
RF_IO0: U1.9
RF_IO1: U1.10
RF_IO2: U1.19 U2.6 | length 26.3
  Top Layer w0.203: 23.464,-12.471 v1(23.464,-12.776) 23.464,-12.268 23.532,-12.2 U1.19 ; U2.6 v1(38.032,-7.428) ; v1@37.924,-7.536 cw(c37.664,-7.796) 38.032,-7.796 ; v1@37.924,-7.536 cw(c37.664,-7.796) 38.032,-7.796 ; v1@37.924,-7.536 cw(c37.664,-7.796) 38.032,-7.796 ; 38.032,-8.053 cw(c37.794,-8.053) 37.962,-8.221 ccw(c37.794,-8.053) 38.032,-8.053 ; 38.032,-8.053 ccw(c38.27,-8.053) 38.102,-8.221 cw(c38.27,-8.053) 38.032,-8.053 ; 38.032,-7.796 cw(c38.4,-7.796) v1@38.14,-7.536 ; 38.032,-7.796 cw(c38.4,-7.796) v1@38.14,-7.536 ; 38.032,-7.796 cw(c38.4,-7.796) v1@38.14,-7.536
  Mid-Layer 1 w0.203: v1(23.464,-12.776) 23.819,-13.132 37.859,-13.132 38.856,-12.135 38.856,-7.722 38.551,-7.417 v1@38.043,-7.417
RF_IO3: U1.20 U2.4 | length 23.9
  Top Layer w0.203: v1(24.032,-12.421) U1.20 ; v1@38.032,-10.479 U2.4 ; 24.032,-12.053 cw(c23.664,-12.053) 23.924,-12.313 ccw(c23.664,-12.053) 24.032,-12.053 ; 24.032,-12.053 ccw(c24.4,-12.053) 24.14,-12.313 cw(c24.4,-12.053) 24.032,-12.053 ; v1@37.935,-10.382 ccw(c37.702,-10.149) 38.032,-10.149 ; v1@37.935,-10.382 ccw(c37.702,-10.149) 38.032,-10.149 ; v1@37.935,-10.382 ccw(c37.702,-10.149) 38.032,-10.149 ; 38.032,-10.095 ccw(c38.438,-10.095) v1@38.151,-10.382 ; 38.032,-10.095 ccw(c38.438,-10.095) v1@38.151,-10.382 ; 38.032,-10.095 ccw(c38.438,-10.095) v1@38.151,-10.382 ; 38.032,-9.828 cw(c38.27,-9.828) 38.102,-9.66 ccw(c38.27,-9.828) 38.032,-9.828 ; 38.032,-9.828 ccw(c37.794,-9.828) 37.962,-9.66 cw(c37.794,-9.828) 38.032,-9.828
  Mid-Layer 1 w0.203: v1(24.032,-12.421) 37.365,-12.421 38.043,-11.742 v1(38.043,-10.49) ; 24.4,-12.421 cw(c24.4,-12.053) 24.14,-12.313 ccw(c24.4,-12.053) 24.4,-12.421 ; 24.4,-12.421 ccw(c24.4,-12.789) 24.14,-12.528 cw(c24.4,-12.789) 24.4,-12.421 ; v1@37.935,-10.598 cw(c37.675,-10.858) 38.043,-10.858 ; v1@37.935,-10.598 cw(c37.675,-10.858) 38.043,-10.858 ; v1@37.935,-10.598 cw(c37.675,-10.858) 38.043,-10.858 ; 38.043,-10.858 cw(c38.411,-10.858) v1@38.151,-10.598 ; 38.043,-10.858 cw(c38.411,-10.858) v1@38.151,-10.598 ; 38.043,-10.858 cw(c38.411,-10.858) v1@38.151,-10.598
RF_IRQ: R8.2 U1.11 U5.8 | length 22
  Top Layer w0.203: R8.2 9.251,-9.8 9.649,-9.402 U5.8 9.649,-7.501 9.823,-7.327 9.823,-7.322 10.006,-7.139 v1(10.363,-7.139) ; R8.2@6.652,-9.94 cw(c6.991,-10.279) 6.991,-9.8 cw(c6.991,-9.321) R8.2@6.652,-9.66 ; v1(16.225,-8.23) 18.18,-8.23 18.552,-8.601 U1.11 ; 16.593,-8.23 cw(c16.593,-7.862) 16.332,-8.122 ccw(c16.593,-7.862) 16.593,-8.23 ; 16.593,-8.23 ccw(c16.593,-8.598) 16.332,-8.337 cw(c16.593,-8.598) 16.593,-8.23
  Bottom Layer w0.203: v1@10.255,-7.247 cw(c9.995,-7.507) 10.363,-7.507 cw(c10.731,-7.507) v1@10.471,-7.247 ; v1(10.363,-7.139) 10.363,-8.079 10.897,-8.612 14.326,-8.612 14.708,-8.23 v1(16.225,-8.23) ; 15.857,-8.23 cw(c15.857,-8.598) 16.117,-8.337 ccw(c15.857,-8.598) 15.857,-8.23 ; 15.857,-8.23 ccw(c15.857,-7.862) 16.117,-8.122 cw(c15.857,-7.862) 15.857,-8.23
RF_RST: U1.1 U5.15 | length 25.7
  Top Layer w0.203: U5.15@13.374,-7.572 U5.15@13.386,-7.572 ; U5.15@13.38,-7.567 U5.15@13.386,-7.572 ; 17.974,-7.572 17.215,-7.572 ; v1(18.482,-7.572) 17.215,-7.572 ; U1.1 24.907,-11.395 25.246,-11.735 v1(26.08,-11.735) ; U5.15@13.386,-7.572 17.215,-7.572 ; 18.114,-7.572 cw(c18.114,-7.94) 18.375,-7.68 ccw(c18.114,-7.94) 18.114,-7.572 ; 18.114,-7.572 ccw(c18.114,-7.204) 18.375,-7.464 cw(c18.114,-7.204) 18.114,-7.572 ; 25.712,-11.735 cw(c25.712,-12.103) v1@25.972,-11.843 ; 25.712,-11.735 ccw(c25.712,-11.367) v1@25.972,-11.627 ; 25.712,-11.735 ccw(c25.712,-11.367) v1@25.972,-11.627 ; 25.712,-11.735 cw(c25.712,-12.103) v1@25.972,-11.843 ; 25.712,-11.735 ccw(c25.712,-11.367) v1@25.972,-11.627 ; 25.712,-11.735 cw(c25.712,-12.103) v1@25.972,-11.843
  Bottom Layer w0.203: v1(18.482,-7.572) 18.482,-11.016 19.201,-11.735 v1(26.08,-11.735) ; v1@18.375,-7.68 cw(c18.114,-7.94) 18.482,-7.94 ; v1@18.375,-7.68 cw(c18.114,-7.94) 18.482,-7.94 ; v1@18.375,-7.68 cw(c18.114,-7.94) 18.482,-7.94 ; 18.482,-7.94 cw(c18.85,-7.94) v1@18.59,-7.68 ; 18.482,-7.94 cw(c18.85,-7.94) v1@18.59,-7.68 ; 18.482,-7.94 cw(c18.85,-7.94) v1@18.59,-7.68 ; 25.712,-11.735 cw(c25.712,-12.103) v1@25.972,-11.843 ; 25.712,-11.735 ccw(c25.712,-11.367) v1@25.972,-11.627 ; 25.712,-11.735 ccw(c25.712,-11.367) v1@25.972,-11.627 ; 25.712,-11.735 cw(c25.712,-12.103) v1@25.972,-11.843 ; 25.712,-11.735 ccw(c25.712,-11.367) v1@25.972,-11.627 ; 25.712,-11.735 cw(c25.712,-12.103) v1@25.972,-11.843
RXD_USB: R5.2 U5.20 U7.26 | length 26.8
  Top Layer w0.203: U5.20 14.226,-5.072 14.701,-4.597 v1(15.158,-4.597)
  Top Layer w0.254: v1(15.373,-10.982) 15.674,-11.283 U7.26 ; v1@15.446,-11.055 cw(c14.956,-11.544) 15.648,-11.544 ccw(c14.956,-11.544) v1@15.446,-11.055
  Mid-Layer 1 w0.203: v1(15.158,-4.597) 13.761,-4.597 13.278,-5.08 13.278,-10.363 13.897,-10.982 v1(15.373,-10.982) ; 14.79,-4.597 cw(c14.79,-4.965) v1@15.05,-4.705 ; 14.79,-4.597 ccw(c14.79,-4.229) v1@15.05,-4.49 ; 14.79,-4.597 ccw(c14.79,-4.229) v1@15.05,-4.49 ; 14.79,-4.597 cw(c14.79,-4.965) v1@15.05,-4.705 ; 14.79,-4.597 ccw(c14.79,-4.229) v1@15.05,-4.49 ; 14.79,-4.597 cw(c14.79,-4.965) v1@15.05,-4.705 ; 15.005,-10.982 cw(c15.005,-11.35) 15.265,-11.09 ccw(c15.005,-11.35) 15.005,-10.982 ; 15.005,-10.982 ccw(c15.005,-10.614) 15.265,-10.874 cw(c15.005,-10.614) 15.005,-10.982
  Bottom Layer w0.203: R5.2 6.945,-9.347 7.315,-9.717 11.709,-9.717 12.975,-10.982 v1(15.373,-10.982)
SPI_MISO: U1.13 U5.12 | length 17.5
  Top Layer w0.203: U5.12 11.649,-9.212 12.013,-9.576 v1(15.856,-9.576) ; v1(17.85,-9.576) 17.876,-9.601 19.298,-9.601 ; 18.841,-9.601 19.298,-9.601 ; 19.349,-9.601 19.781,-9.601 ; U1.13@21.131,-9.576 U1.13 19.781,-9.601 ; 15.488,-9.576 cw(c15.488,-9.944) 15.748,-9.684 ccw(c15.488,-9.944) 15.488,-9.576 ; 15.488,-9.576 ccw(c15.488,-9.208) 15.748,-9.468 cw(c15.488,-9.208) 15.488,-9.576 ; 19.298,-9.601 19.781,-9.601 ; v1@17.958,-9.684 cw(c18.157,-9.882) 18.157,-9.601 ccw(c18.157,-9.882) v1@17.958,-9.684 ; v1@17.958,-9.468 ccw(c18.279,-9.147) 18.279,-9.601 cw(c18.279,-9.147) v1@17.958,-9.468
  Bottom Layer w0.203: v1(15.856,-9.576) 17.825,-9.576 v1@17.85,-9.601 ; v1@15.963,-9.684 cw(c16.224,-9.944) 16.224,-9.576 ; v1@15.963,-9.684 cw(c16.224,-9.944) 16.224,-9.576 ; v1@15.963,-9.684 cw(c16.224,-9.944) 16.224,-9.576 ; v1@15.963,-9.468 ccw(c16.224,-9.208) 16.224,-9.576 ; v1@15.963,-9.468 ccw(c16.224,-9.208) 16.224,-9.576 ; v1@15.963,-9.468 ccw(c16.224,-9.208) 16.224,-9.576 ; 17.482,-9.576 cw(c17.482,-9.944) v1@17.742,-9.684 ; 17.482,-9.576 ccw(c17.482,-9.208) v1@17.742,-9.468 ; 17.482,-9.576 ccw(c17.482,-9.208) v1@17.742,-9.468 ; 17.482,-9.576 cw(c17.482,-9.944) v1@17.742,-9.684 ; 17.482,-9.576 ccw(c17.482,-9.208) v1@17.742,-9.468 ; 17.482,-9.576 cw(c17.482,-9.944) v1@17.742,-9.684
SPI_MOSI: U1.14 U5.13 | length 10.3
  Top Layer w0.203: U5.13 12.149,-8.828 12.389,-9.068 16.313,-9.068 17.355,-10.109 21.149,-10.109 U1.14
SPI_NSS: U1.15 U5.10 | length 12.9
  Top Layer w0.203: U5.10 10.649,-9.863 11.387,-10.601 14.757,-10.601 15.148,-10.211 16.755,-10.211 17.145,-10.601 U1.15
SPI_SCK: U1.12 U5.11 | length 17.9
  Top Layer w0.203: U5.11 11.149,-9.474 11.759,-10.084 v1(14.382,-10.084) ; v1(17.063,-8.763) 17.901,-8.763 18.231,-9.093 21.149,-9.093 U1.12 20.17,-9.101 ; 14.014,-10.084 cw(c14.014,-10.452) 14.275,-10.192 ccw(c14.014,-10.452) 14.014,-10.084 ; 14.014,-10.084 ccw(c14.014,-9.716) 14.275,-9.976 cw(c14.014,-9.716) 14.014,-10.084 ; 17.431,-8.763 cw(c17.431,-8.395) 17.171,-8.655 ccw(c17.431,-8.395) 17.431,-8.763 ; 17.431,-8.763 ccw(c17.431,-9.131) 17.171,-8.871 cw(c17.431,-9.131) 17.431,-8.763
  Bottom Layer w0.203: v1@14.275,-9.976 ccw(c14.014,-9.716) 14.382,-9.716 ccw(c14.75,-9.716) v1@14.49,-9.976 ; v1@14.39,-10.084 v1(14.382,-10.084) 14.382,-9.241 14.86,-8.763 v1(17.063,-8.763) ; 16.695,-8.763 cw(c16.695,-9.131) 16.955,-8.871 ccw(c16.695,-9.131) 16.695,-8.763 ; 16.695,-8.763 ccw(c16.695,-8.395) 16.955,-8.655 cw(c16.695,-8.395) 16.695,-8.763
SWCLK: P1.3 U5.22 | length 9.9
  Top Layer w0.254: U5.22@12.665,-3.983 cw(c12.825,-4.143) 12.825,-3.917 ; U5.22@12.719,-3.917 U5.22@12.731,-3.917 ; U5.22@12.725,-3.912 U5.22@12.731,-3.917 ; v1(13.685,-3.48) 13.247,-3.917 U5.22@12.731,-3.917
  Bottom Layer w0.254: P1.3@10.871,-0.584 10.891,-0.604 10.891,-3.405 11.219,-3.734 13.431,-3.734 v1(13.685,-3.48) ; 12.765,-3.734 ccw(c12.765,-2.56) 13.595,-3.39 cw(c12.765,-2.56) 12.765,-3.734 ; 13.378,-3.734 ccw(c13.378,-3.173) 13.774,-3.57 cw(c13.378,-3.173) 13.378,-3.734
SWDIO: P1.2 U5.21 | length 8.1
  Top Layer w0.254: U5.21 13.837,-4.572 v1(14.523,-3.886) ; 14.306,-4.103 cw(c14.523,-4.32) v1@14.523,-4.013 ; 14.306,-4.103 ccw(c14.089,-3.886) v1@14.396,-3.886 ; 14.306,-4.103 ccw(c14.089,-3.886) v1@14.396,-3.886 ; 14.306,-4.103 cw(c14.523,-4.32) v1@14.523,-4.013 ; 14.306,-4.103 ccw(c14.089,-3.886) v1@14.396,-3.886 ; 14.306,-4.103 cw(c14.523,-4.32) v1@14.523,-4.013
  Bottom Layer w0.254: P1.2 12.161,-2.382 12.7,-2.921 14.091,-2.921 14.523,-3.353 v1(14.523,-3.886)
TXD_USB: R24.2 U5.19 U7.25 | length 21.6
  Top Layer w0.203: U5.19 v1(14.64,-5.572) ; v1(15.983,-10.726) 15.983,-11.053 16.174,-11.244 U7.25
  Mid-Layer 1 w0.203: v1(14.64,-5.572) 14.031,-5.572 13.761,-5.842 13.761,-10.181 14.172,-10.592 14.89,-10.592 15.043,-10.439 15.696,-10.439 v1(15.983,-10.726)
  Bottom Layer w0.203: R24.2 6.833,-8.153 8.041,-9.361 11.963,-9.361 13.229,-10.627 15.01,-10.627 15.163,-10.474 15.731,-10.474 v1(15.983,-10.726)
VCC: C58.2 C62.1 C63.1 D3.A R12.1 U3.5 U7.7 U7.8 USB.1 | length 52.9
  Top Layer w0.305: U3.5 v1(10.49,-11)
  Top Layer w0.381: USB.1@2.077,-7.188 USB.1 ; 3.301,-7.188 USB.1 ; v2(3.886,-7.188) USB.1 ; v1(9.042,-16.156) 9.042,-15.748 9.246,-15.545 9.931,-15.545 C62.1 12.338,-15.545 13.164,-16.37 14.484,-16.37 ; C62.1@10.169,-15.658 ccw(c9.897,-15.93) 9.897,-15.545 ccw(c9.897,-15.16) C62.1@10.169,-15.432 ; C62.1@10.545,-15.658 cw(c10.817,-15.93) 10.817,-15.545 cw(c10.817,-15.16) C62.1@10.545,-15.432 ; 13.901,-16.37 U7.7@13.901,-15.646 ; 11.426,-15.545 cw(c11.426,-15.864) 11.651,-15.638 ccw(c11.426,-15.864) 11.426,-15.545 ; R12.1@11.806,-15.638 cw(c12.032,-15.864) 12.032,-15.545 ccw(c12.032,-15.864) R12.1@11.806,-15.638
  Top Layer w0.508: v2(3.48,-11.939) 3.48,-12.574 3.835,-12.93 D3.A ; v2(3.886,-7.188) 3.909,-7.188 C58.2
  Mid-Layer 1 w0.381: 1.372,-7.252 3.823,-7.252 v2(3.886,-7.188)
  Mid-Layer 1 w0.508: -0.888,-11.939 v2(3.48,-11.939) ; 1.372,-7.252 -0.062,-7.252 -0.914,-8.104 -0.914,-16.486 -0.019,-17.381 8.653,-17.381 9.042,-16.991 9.042,-16.561 v1(9.042,-16.156) 9.042,-11.584 9.627,-11 v1(10.49,-11)
  Bottom Layer w0.508: C63.1 3.029,-12.391 v2(3.48,-11.939)
VCC_HV: D3.K D4.2 F1.1 P3.2 | length 30
  Top Layer w0.508: D3.K@4.648,-15.43 4.73,-15.512 v2(4.73,-16.467) ; v2@4.667,-16.53 v2@4.73,-16.594
  Bottom Layer w0.508: -1.188,-9.15 P3.2@0.997,-9.15 ; D4.2@0.997,-3.168 D4.2 -0.559,-3.15 -1.188,-3.779 -1.188,-9.792 -1.188,-16.898 -0.609,-17.478 4.278,-17.478 4.73,-17.025 v2(4.73,-16.467) F1.1@4.73,-15.603 ; F1.1@4.531,-15.371 cw(c4.05,-15.852) 4.73,-15.852 ccw(c4.05,-15.852) F1.1@4.531,-15.371 ; 4.558,-17.198 ccw(c4.186,-16.826) 4.624,-16.537 cw(c4.186,-16.826) 4.558,-17.198 ; 4.73,-15.729 cw(c5.238,-15.729) 4.879,-15.371 ccw(c5.238,-15.729) 4.73,-15.729
VDD_RF: C8.1 C9.2 C23.2 C24.2 C64.2 FB5.1 L5.1 U1.6 U1.8 | length 18.8
  Top Layer w0.381: U1.8 C64.2@23.032,-5.371 ; 24.226,-7.726 24.831,-7.726 25.572,-6.985 25.572,-5.221 ; C64.2@22.916,-5.412 cw(c22.638,-5.69) 23.032,-5.69 ; C64.2@22.916,-5.412 cw(c22.638,-5.69) 23.032,-5.69 ; C64.2@22.916,-5.412 cw(c22.638,-5.69) 23.032,-5.69 ; 23.032,-5.677 cw(c23.408,-5.677) C64.2@23.142,-5.412 ; 23.032,-5.677 cw(c23.408,-5.677) C64.2@23.142,-5.412 ; 23.032,-5.677 cw(c23.408,-5.677) C64.2@23.142,-5.412
  Top Layer w0.762: FB5.1 17.483,-5.221 21.618,-5.221 23.104,-5.221 25.572,-5.221 L5.1@27.213,-5.221 ; L5.1 C8.1
pads on no net: P3. U1.7 U5.6 U5.7 U5.9 U5.14 U5.23 U5.24 U5.25 U5.26 U5.27 U5.28 U7.1 U7.2 U7.10 U7.12 U7.13 U7.14 U7.15 U7.16 U7.17 U7.18 U7.19 U7.20 U7.21 U7.22 U7.23 U7.24 U7.27 U7.28 USB.3@2.085,-6.499 USB.4@2.085,-10.499 USB.6 USB.9

## Polygon pours and split planes (outlines as drawn)
GND on Mid-Layer 1 "Bottom Layer-No Net" (solid, remove dead copper, pour order 1001): 19.171,0.688 19.171,-18.743 19.578,-19.149 19.73,-18.997 21.127,-18.997 47.035,-18.997 47.772,-18.26 48.254,-17.778 48.254,-14.603 48.254,0.968 46.908,2.314 46.299,2.923 22.829,2.923 20.365,2.923 19.324,1.882 19.171,1.73 19.171,0.688
GND on Mid-Layer 1 "Bottom Layer-No Net" (solid, remove dead copper, pour order 1001): 20.758,-7.881 20.834,-7.805 24.847,-7.805 24.847,-11.006 24.746,-11.107 24.695,-11.158 24.111,-11.158 21.24,-11.158 21.037,-10.955 20.758,-10.675 20.758,-7.881
3V3 on Mid-Layer 1 "Bottom Layer-No Net" (solid, remove dead copper, pour order 1000): 17.999,1.294 17.973,1.269 17.973,-17.908 -1.915,-17.908 -2.067,-17.756 -1.87,-17.559 -1.87,1.016 18.051,1.016 18.126,1.091
GND on Bottom Layer "Bottom Layer-No Net" (solid, remove dead copper, pour order 1003): -2.388,1.009 -2.388,-18.422 -1.681,-18.828 -1.416,-18.676 1.013,-18.676 46.057,-18.676 47.338,-17.939 48.177,-17.456 48.177,-14.281 48.177,1.289 45.836,2.635 44.776,3.245 3.972,3.245 -0.312,3.245 -2.123,2.203 -2.388,2.051 -2.388,1.009
GND on Bottom Layer "Bottom Layer-No Net" (solid, remove dead copper, pour order 1002): 21.19,-7.729 21.215,-7.754 24.669,-7.754 24.669,-10.853 24.492,-11.031 24.441,-11.082 22.866,-11.082 21.24,-11.082 20.986,-10.828 21.19,-10.625 21.19,-7.729
GND on Top Layer "Bottom Layer-No Net" (solid, remove dead copper, pour order 1000): -2.184,1.321 -2.083,1.422 46.66,1.422 46.66,-18.339 46.584,-18.415 46.558,-18.39 -2.388,-18.39 -2.388,1.118 -2.184,1.321
GND on Internal Plane 1 (split plane): 45.579,-17.792 -1.401,-17.792 -1.401,0.824 45.579,0.824
GND on Internal Plane 1 (split plane): 45.579,1.208 -1.401,1.208 -1.401,1.506 45.579,1.506
GND on Internal Plane 1 (split plane): 45.579,-18.474 -1.401,-18.474 -1.401,-18.176 45.579,-18.176

## Keep-outs
Keep-Out Layer:
  lines w0.2: -1.911,-18.364 -1.911,1.676 46.089,1.676 46.089,-18.364 -1.911,-18.364

## Other copper
Top Layer:
  rectangle net 3V3: 14.332,-7.069 15.233,-6.205
  rectangle net 3V3: 12.725,-6.731 14.37,-5.918
  rectangle net GND: 31.502,-8.764 35.261,-6.986
  rectangle net GND: 27.788,-8.77 31.731,-8.237
Bottom Layer:
  rectangle net GND: 0.229,-11.963 1.092,-10.846
  rectangle net GND: 7.391,-12.725 7.95,-11.303
  rectangle net NetC54_1: 8.357,-13.463 8.966,-11.685
  rectangle net NetC54_1: 4.064,-13.717 8.966,-13.082
  rectangle net 3V3: 10.008,-12.955 10.668,-12.701
  rectangle net 3V3: 9.322,-12.778 12.624,-11.812
  rectangle net 3V3: 10.008,-13.59 12.624,-12.092
Internal Plane 1 (plane layer: these items are gaps in the copper):
  lines w0.381: -1.911,-17.984 46.089,-17.984 46.089,1.016 -1.911,1.016 -1.911,-17.984
  lines w0.762: 18.923,-12.421 18.923,-3.073

## Silkscreen, mask and mechanical layers (free items; w line width, h text height)
Top Overlay:
  region: 42.768,-11.913 42.768,-9.754 41.752,-9.754 41.752,-11.913
  region: 44.774,-11.963 44.774,-9.804 43.758,-9.804 43.758,-11.963
  lines w0.127: 37.078,-4.699 37.078,-4.978 37.332,-5.232 38.181,-5.232
  lines w0.2: 13.487,-1.484 13.487,-2.464 15.646,-2.464 15.646,-1.346
  text "DL" at 14.097,-3.607 h0.76
  text "433MHz" at 41.828,-12.243 h0.76 r270
  text "915MHz" at 43.86,-12.421 h0.76 r270
  text "RF_V2.3_A" at 31.09,-15.392 h1.02
Bottom Overlay:
  lines w0.127: 30.658,-13.819 30.658,-8.198 33.401,-8.198 33.401,-13.819 30.658,-13.819
  text "P3" at 32.549,-7.672 h0.76
  text "TXD" at 33.122,-9.652 h0.76
  text "RXD" at 32.969,-10.897 h0.76
  text "5V" at 32.944,-12.04 h0.76
  text "GND" at 32.956,-13.209 h0.76
Top Solder:
  lines w0.5: 17.85,0.051 40.761,0.051 40.761,-1.6 ; 19.933,-11.455 19.933,-16.764 20.035,-16.866 40.761,-16.866 40.761,-7.722
Mechanical 1:
  the board outline again, w0.2